# Altium PCB Drv870e_Dual_Motor_Drive_Board.PcbDoc
Units mil, origin at the board's own origin, x right, y up, seen from the top; angles counter-clockwise.
Board outline 2615 x 1130 mil, 2 copper layers (Top Layer, Bottom Layer); 44 components, 38 nets, 213 pads, 38 vias.
Unrouted connection lines stored in the file: 45.
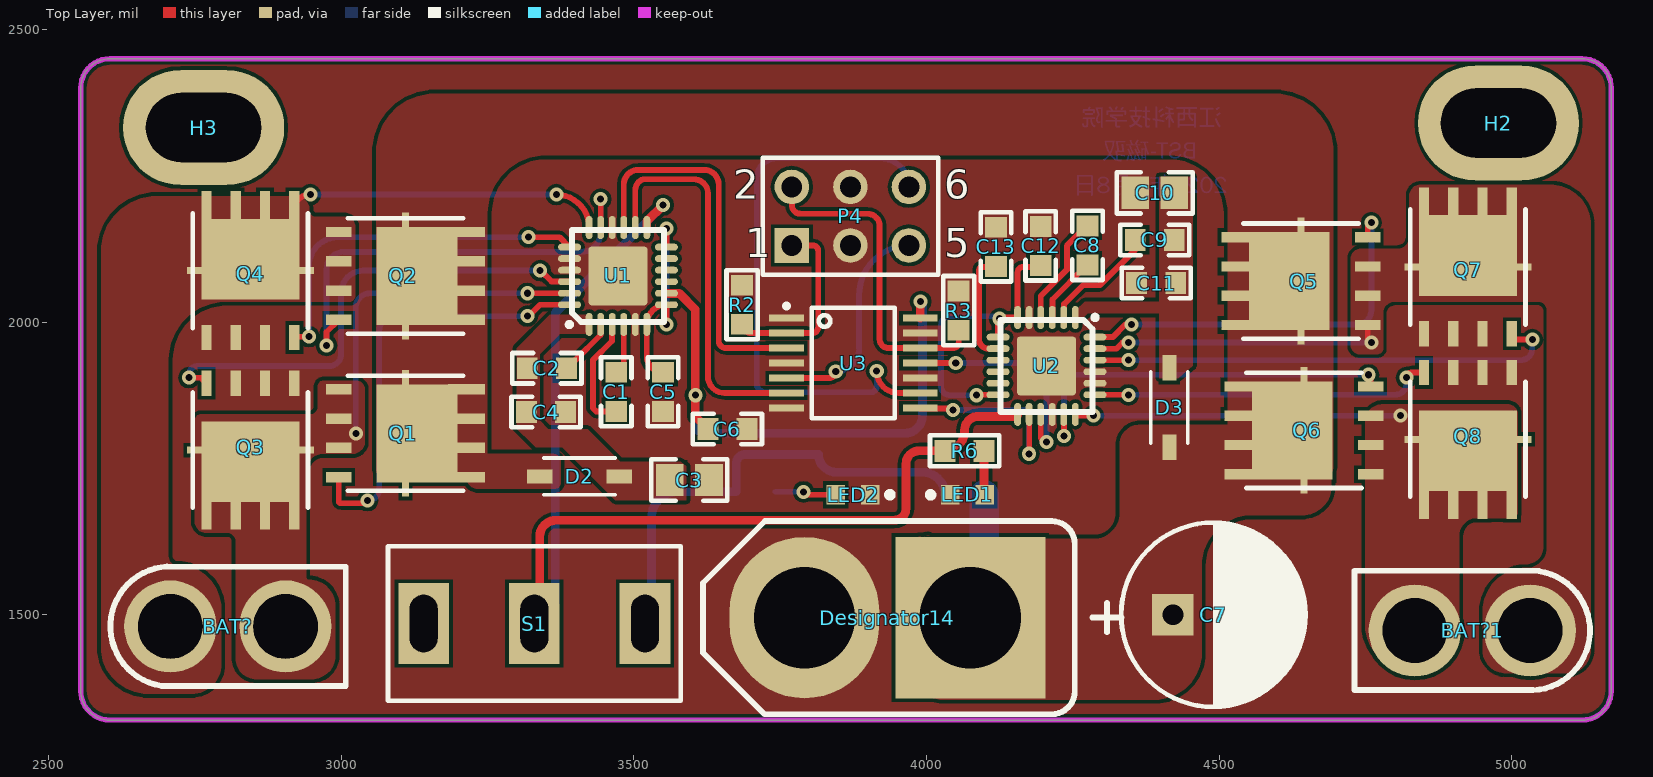
[diagram p0: Top Layer view]
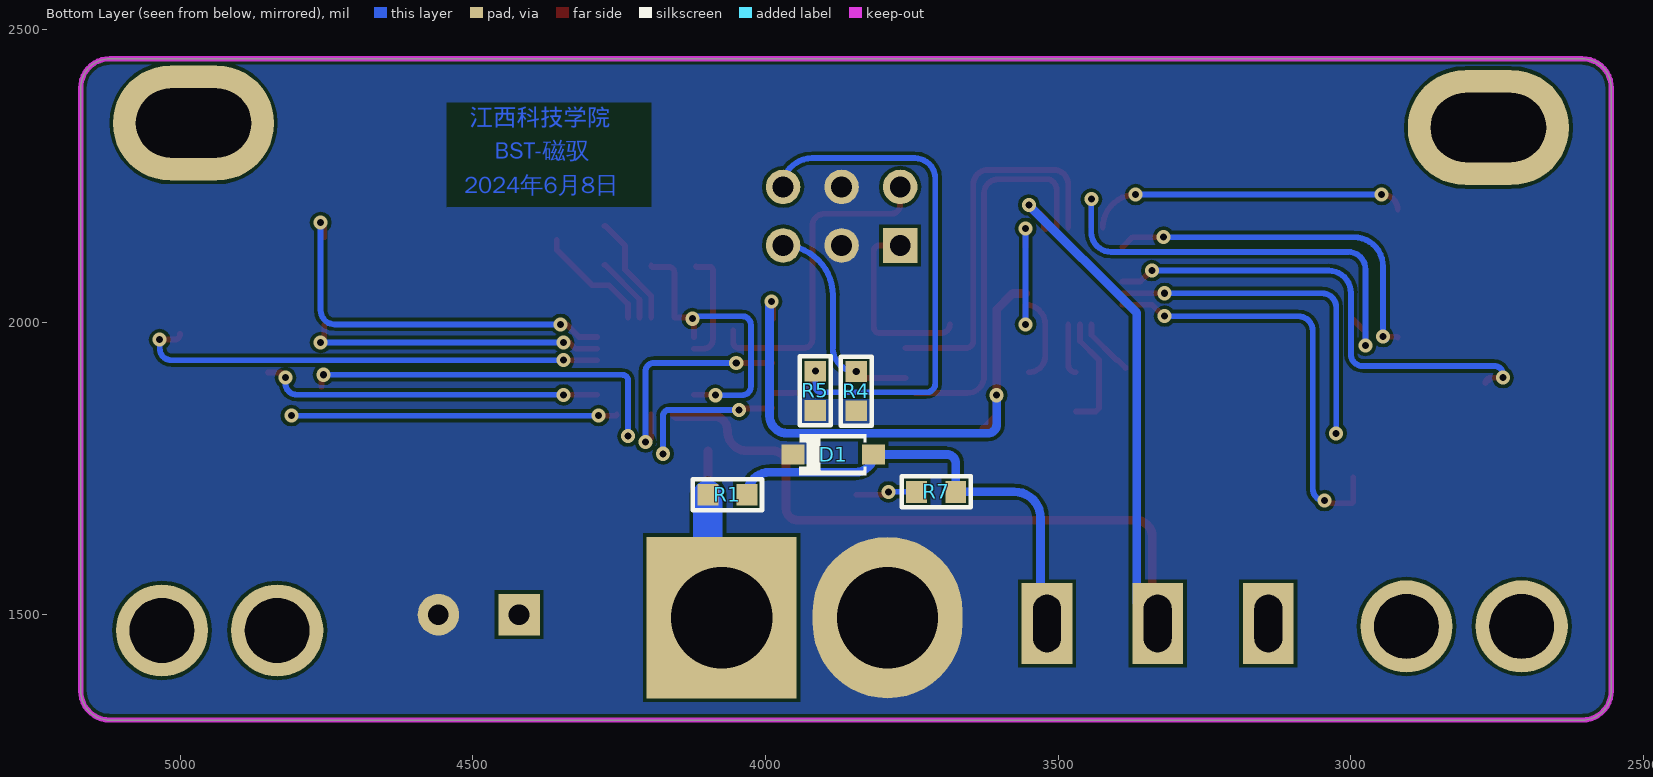
[diagram p1: Bottom Layer view, seen from below]
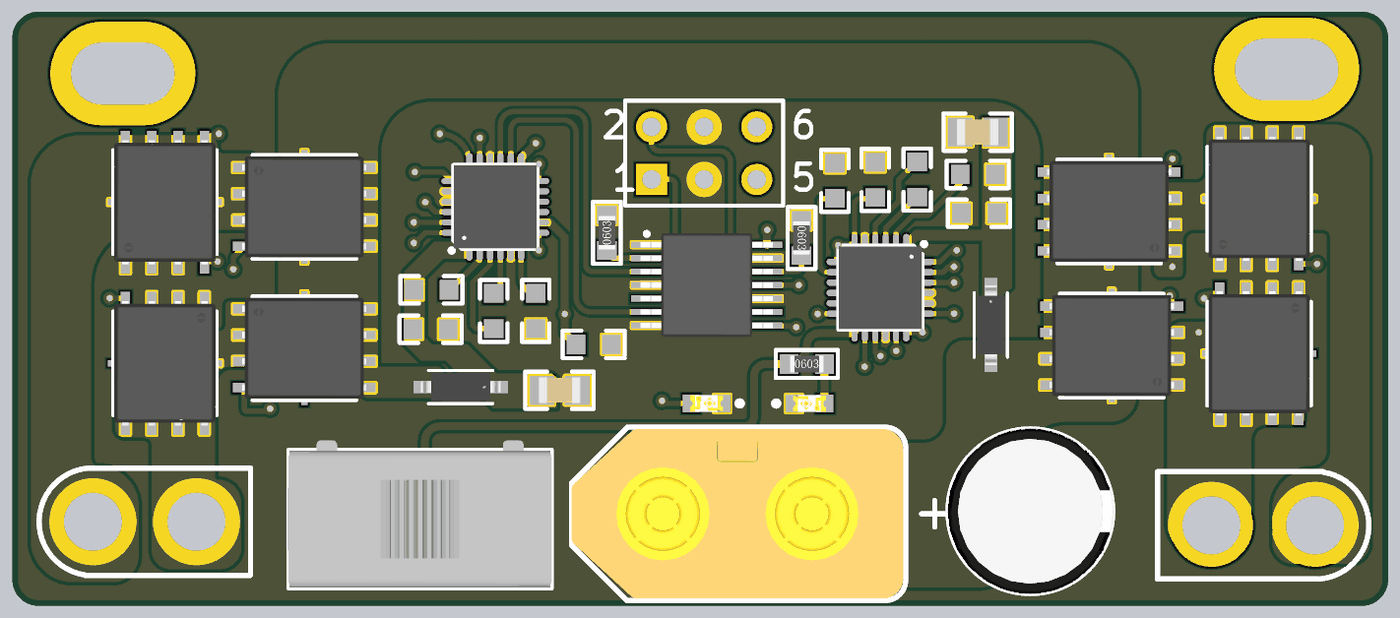
[diagram p2: 3D render of the assembled board from above, using the file's embedded part models]
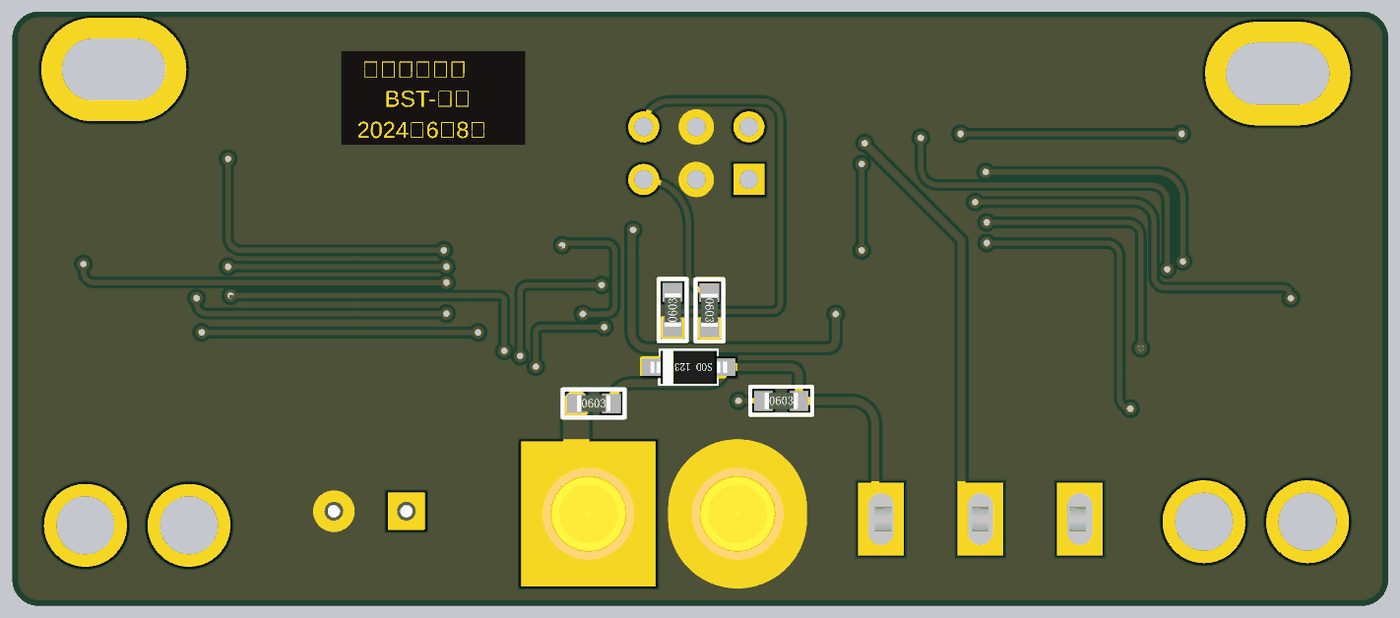
[diagram p3: 3D render of the assembled board from below, using the file's embedded part models]

## Layer stack, top to bottom
Top Solder: solder mask 0.4, Solder Resist, Dk 3.5
Top Layer: signal copper 1.4
Dielectric 1: dielectric 12.6, FR-4, Dk 4.8
Bottom Layer: signal copper 1.4
Bottom Solder: solder mask 0.4, Solder Resist, Dk 3.5

## Board outline
2555,1370 ccw(c2605,1370) 2605,1320 5120,1320 ccw(c5120,1370) 5170,1370 5170,2400 ccw(c5120,2400) 5120,2450 2605,2450 ccw(c2605,2400) 2555,2400

## Design rules (kind name [scope] priority, off if disabled: settings)
Clearance [All] p1: gap=6 ignorepadtopadclearanceinfootprint=FALSE
DiffPairsRouting [All] p1: maxlimit=10 minlimit=10 mostfreqgap=10 toplayer_minwidth=15 toplayer_maxwidth=15 toplayer_prefwidth=15 bottomlayer_minwidth=15 bottomlayer_maxwidth=15 bottomlayer_prefwidth=15 substack1={0DC552CE-7F27-4ACE-919D-D27756115782} toplayer_{0dc552ce-7f27-4ace-919d-d27756115782}_minwidth=15 toplayer_{0dc552ce-7f27-4ace-919d-d27756115782}_maxwidth=15 toplayer_{0dc552ce-7f27-4ace-919d-d27756115782}_prefwidth=15 bottomlayer_{0dc552ce-7f27-4ace-919d-d27756115782}_minwidth=15 bottomlayer_{0dc552ce-7f27-4ace-919d-d27756115782}_maxwidth=15 bottomlayer_{0dc552ce-7f27-4ace-919d-d27756115782}_prefwidth=15 maxuncoupledlength=500
PlaneConnect [All] p1: planeconnectstyle=Direct reliefexpansion=20 reliefentries=4 reliefconductorwidth=10 reliefairgap=10
PolygonConnect [All] p1: connectstyle=Direct reliefconductorwidth=10 reliefentries=4 polygonreliefangle="90 Angle" airgapwidth=10
RoutingVias [All] p1: holewidth=28 width=50 viastyle="Through Hole" minholewidth=28 minwidth=50 maxholewidth=28 maxwidth=50
SolderMaskExpansion [All] p1: expansion=4 istentingtop=FALSE
Width [All] p1: maxlimit=50 minlimit=10 preferedwidth=10 substack1={0DC552CE-7F27-4ACE-919D-D27756115782}
28 further rules are at their usual default settings.

## Classes and differential pairs
net class GND: GND
component class "Copy of Sheet2": C1 C2 C3 C4 C5 C6 C7 C8 C9 C10 C11 C12 C13 D1 D2 D3 H2 H3 LED1 LED2 P4 Q1 Q2 Q3 Q4 Q5 Q6 Q7 Q8 R1 R2 R3 R4 R5 R6 R7 S1 U1 U2 U3

## Components (designator, comment, footprint, x,y, rotation, side; value= is the part's Value field where it differs from the comment)
BAT? "LQ_XT30UPB-F" LQ_XT30UPB-F 2809.27,1480 r0 top
BAT?1 "LQ_XT30UPB-F" LQ_XT30UPB-F 4930,1473.11 r180 top (schematic designator BAT?)
C1 "100nF" CAPC1608[0603]S-N 3470,1880.76 r270 top
C2 "1uF" CAPC1608[0603]S-N 3351.54,1921.11 r0 top
C3 "10uF" CAPC2012[0805]S-N 3595,1730 r180 top
C4 "100nF" CAPC1608[0603]S-N 3350,1846.11 r180 top
C5 "1uF" CAPC1608[0603]S-N 3550,1880.76 r270 top
C6 "1uF" CAPC1608[0603]S-N 3660,1817.19 r180 top
C7 "220u/25V" CAPPR3.5-8X11.5 4490,1500 r0 top
C8 "100nF" CAPC1608[0603]S-N 4275,2130.86 r270 top
C9 "1uF" CAPC1608[0603]S-N 4390,2140.47 r180 top
C10 "10uF" CAPC2012[0805]S-N 4390,2220.83 r0 top
C11 "100nF" CAPC1608[0603]S-N 4392.37,2066.62 r0 top
C12 "1uF" CAPC1608[0603]S-N 4195.16,2130 r90 top
C13 "1uF" CAPC1608[0603]S-N 4118.49,2128.37 r270 top
D1 "Comment" SOD-123-L 3884.53,1773.71 r0 bottom
D1 "BZT52C3V3" SOD-123 3710,1587.8 r180 top
D2 "1N5819" 1N5819 3314.09,1762.7 r180 top
D3 "1N5819" 1N5819 4388.5,1761.13 r270 top
Designator14 "Comment" TX60-LI-S 3933.27,1495 r180 top
H2 "Holes" M3-MountSlot 4994.36,2362.8 r180 top
H3 "Holes" M3-MountSlot 2782.17,2355.16 r180 top
LED1 "LED" LEDC1608(0603) 4070,1704.86 r0 top
LED2 "LED" LEDC1608(0603) 3874.53,1705 r180 top
P4 "双排针2X3P 2.54MM直插" HDR2X3 3770,2130.86 r0 top
Q1 "TPH1R403NL_L" DFN5x6 3110,1810 r270 top
Q2 "TPH1R403NL_L" DFN5x6 3110,2078.78 r270 top
Q3 "TPH1R403NL_L" DFN5x6 2845,1781.3 r180 top
Q4 "TPH1R403NL_L" DFN5x6 2845,2087.81 r0 top
Q5 "TPH1R403NL_L" DFN5x6 4639.69,2070 r90 top
Q6 "TPH1R403NL_L" DFN5x6 4644.69,1815 r90 top
Q7 "TPH1R403NL_L" DFN5x6 4925,2094.17 r0 top
Q8 "TPH1R403NL_L" DFN5x6 4925,1799.69 r180 top
R1 "2.2K" RESC1608[0603]S-N 4065,1705 r180 bottom
R2 "10K" RESC1608[0603]S-N 3685,2029.56 r90 top
R3 "10K" RESC1608[0603]S-N 4055,2019.56 r270 top
R4 "10K" RESC1608[0603]S-N 3845,1882.02 r270 bottom
R5 "10K" RESC1608[0603]S-N 3915,1882.59 r90 bottom
R6 "330R" RESC1608[0603]S-N 4065,1780 r0 top
R7 "1K" RESC1608[0603]S-N 3708.46,1710 r180 bottom
S1 "SW1:T8013" SS12D10 3330,1485 r0 top
U1 "DRV8701E" QFN24-4x4 3472.97,2078.78 r90 top
U2 "DRV8701E" QFN24-4x4 4205,1925 r270 top
U3 "SN74HC125PWR" TSSOP-14 3875,1930 r0 top

## Footprints (in the part's own frame and the unit in brackets; to place one, negate y for a bottom-side part, rotate by r counter-clockwise, add the part's x,y. Pads: shape width x height; smd on the part's side, far side on the other; paste and mask are expansions set on the pad)
1N5819 [mil]
  rect 43.75x23.65 smd paste+0 mask+0: 1(-160.91,26.5) 2(-25.08,26.5)
  silkscreen extent -154,-5 -32,58, body extent -169,0 -17,53, height 32
CAPC1608[0603]S-N [mm]
  rect 0.9x0.95 smd: 1(-0.85,0) 2(0.85,0)
  silkscreen extent -1.5,-0.66 1.5,0.66, body extent -0.8,-0.41 0.8,0.41, height 0.79
CAPC2012[0805]S-N [mm]
  rect 1.2x1.4 smd: 1(-0.85,0) 2(0.85,0)
  silkscreen extent -1.65,-0.9 1.65,0.9, body extent -1,-0.63 1,0.62, height 1.25
CAPPR3.5-8X11.5 [mm]
  rect 1.8x1.8 hole 0.9: 1(-1.75,0)
  round 1.8 hole 0.9: 2(1.75,0)
  silkscreen extent -4,-4.01 4,4, body extent -4,-3.98 4,3.98, height 11.5
DFN5x6 [mm]
  rect 0.45x1.6 smd: 1(-1.905,2.65) 1(-0.635,2.65) 1(0.635,2.65) 1(1.905,2.65)
  rect 5.5x0.3 smd: 1(0,0)
  rect 4.25x3.5 smd: 1(0,0.5)
  rect 0.45x1.1 smd: 2(1.905,-2.9) 3(-1.905,-2.9) 3(-0.635,-2.9) 3(0.635,-2.9)
  silkscreen extent -2.5,-2.5 2.5,2.5, body extent -2.45,-3 2.45,3, height 1
HDR2X3 [mm] "Connector; Header; 3x2 Position"
  rect 1.5x1.5 hole 0.9: 1(0,0)
  round 1.5 hole 0.9: 2(0,2.54) 3(2.54,0) 4(2.54,2.54) 5(5.08,0) 6(5.08,2.54)
  silkscreen extent -1.27,-1.27 6.35,3.81
LEDC1608(0603) [mm]
  rect 0.8x0.85 smd: A(0.75,0) C(-0.75,0)
  silkscreen extent -1.72,-0.12 -1.48,0.12, body extent -0.8,-0.4 0.8,0.4, height 0.64
LQ_XT30UPB-F [mm]
  round 4 hole 2.8 slot 2.805 at 90 deg: 1(2.432,0) 2(-2.569,0)
  silkscreen extent -5.17,-2.59 5.04,2.6
M3-MountSlot [mm]
  oval 7x5 hole 3 slot 5 at 0 deg: 1(0.436,0.579)
QFN24-4x4 [mm]
  rrect10% 2.55x2.55 smd: 0(0,0)
  oval 1x0.3 smd: 1(-2.1,1.25) 2(-2.1,0.75) 3(-2.1,0.25) 4(-2.1,-0.25) 5(-2.1,-0.75) 6(-2.1,-1.25) 13(2.1,-1.25) 14(2.1,-0.75) 15(2.1,-0.25) 16(2.1,0.25) 17(2.1,0.75) 18(2.1,1.25)
  oval 0.3x1 smd: 7(-1.25,-2.1) 8(-0.75,-2.1) 9(-0.25,-2.1) 10(0.25,-2.1) 11(0.75,-2.1) 12(1.25,-2.1) 19(1.25,2.1) 20(0.75,2.1) 21(0.25,2.1) 22(-0.25,2.1) 23(-0.75,2.1) 24(-1.25,2.1)
  silkscreen extent -2.21,-2 2,2.21, body extent -2,-2 2,2, height 0.9
RESC1608[0603]S-N [mm]
  rect 0.9x0.95 smd: 1(-0.85,0) 2(0.85,0)
  silkscreen extent -1.5,-0.67 1.5,0.67, body extent -0.8,-0.4 0.8,0.4, height 0.45
SOD-123 [mm]
  rect 1.2x1.4 smd: 1(-840.775,188.833) 2(-837.375,188.833)
  silkscreen extent -840.58,187.83 -837.58,189.83
SOD-123-L [mm]
  rect 1x0.85 smd: A(-1.75,0) K(1.75,0)
  silkscreen extent -1.45,-0.9 1.48,0.9, body extent -1.85,-0.8 1.85,0.8, height 1.2
SS12D10 [mm]
  rect 2.2x3.5 hole 1.2 slot 2.5 at 90 deg mask+0.07: 1(-4.8,0) 2(0,0) 3(4.8,0)
  silkscreen extent -6.35,-3.35 6.35,3.35, body extent -6.4,-3.3 6.35,3.8, height 12.5
TSSOP-14 [mm]
  rect 1.5x0.3 smd mask+0.07: 1(-2.9,1.95) 2(-2.9,1.3) 3(-2.9,0.65) 4(-2.9,0) 5(-2.9,-0.65) 6(-2.9,-1.3) 7(-2.9,-1.95) 8(2.9,-1.95) 9(2.9,-1.3) 10(2.9,-0.65) 11(2.9,0) 12(2.9,0.65) 13(2.9,1.3) 14(2.9,1.95)
  silkscreen extent -2.99,-2.4 1.8,2.57, body extent -3.2,-2.5 3.2,2.5, height 1.13
TX60-LI-S [mm] "长：16mm，宽：8.2mm，高：16mm"
  rect 6.5x7 hole 4.4: 1(-3.6,0)
  oval 6.5x7 hole 4.4: 2(3.6,0)
  silkscreen extent -10.16,-4.19 8,4.19, body extent -8,-4.1 8,4.1, height 16.05

## Part data
C1 C2 C4 C5 C6 C8 C9 C11 C12 C13: library part 0603-C
C3 C10: library part 0805-C
H2 H3: library part 星月孔, "holes in the corner of the bord"
R1 R2 R3 R4 R5 R6 R7: library part 0603-R

## Via types
v1: diameter 24, hole 12, Top Layer to Bottom Layer, tented both sides, 38 vias

## Nets (pads, with @x,y where several pads share a name; then routed paths per layer and width w, separated by ;. In a path a pad name is that pad's centre, name@x,y a point inside that pad or via, vN(x,y) a via of type N, cw(c..) or ccw(c..) an arc to the next point about the centre after c; other vN are vias at no path point)
3V3: D1.2 D1.A R1.2 R7.2 S1.3 | length 810
  Bottom Layer w15: S1.3 ccw(c3518.98,1496.02) 3530,1496.02 3530,1665 cw(c3575,1665) 3575,1710 R7.2 3675,1758.71 cw(c3690,1758.71) 3690,1773.71 D1.A ccw(c3845.86,1773.71) 3845.86,1743.48 3993.06,1743.48 cw(c3993.06,1705) R1.2
DVDD: C6.2 U1.8 U3.14 | length 963.2
  Top Layer w15: U1.8 3555.93,2048.97 3577.47,2048.97 3605,2021.44 v1(3605,1875) 3605,1838.72 C6.2 ; U3.14 3989.17,2034.17 cw(c3990,2034.17) v1(3990,2035)
  Bottom Layer w15: v1(3605,1875) 3605,1825 ccw(c3620,1825) 3620,1810 3963.06,1810 ccw(c3963.06,1840) 3993.06,1840 3993.06,2031.94 ccw(c3990,2031.94) v1(3990,2035)
GND: C3.1 C4.1 C5.2 C6.1 C7.2 C10.1 C11.1 C12.2 C13.1 D1.1 D1.K Designator14.2 LED1.C LED2.C P4.3 P4.4 Q3.3 Q4.3 Q7.3 Q8.3 R2.2 R3.1 R4.2 R5.1 U1.0 U1.5 U1.16 U1.20 U1.21 U2.0 U2.5 U2.16 U2.20 U2.21 U3.1 U3.4 U3.7 U3.10 U3.13
L_A: BAT?.1 Q1.3 Q3.1 U1.23 | length 594.1
  Top Layer w10: v1(3318.07,2049.25) U1.23
  Bottom Layer w10: v1(3025,1810) 3025,2025 cw(c3049.25,2025) 3049.25,2049.25 v1(3318.07,2049.25)
L_B: BAT?.2 Q2.3 Q4.1 U1.18 | length 552.3
  Top Layer w10: Q4.1@2920,2192.15 cw(c2945.53,2192.15) v1@2945.53,2217.68 ; v1(3367.53,2217.68) cw(c3367.53,2161.45) U1.18
  Bottom Layer w10: v1@2945,2220 ccw(c2947.32,2220) v1(2947.32,2217.68) v1(3367.53,2217.68)
L_EN: U1.14 U3.6 | length 658.8
  Top Layer w10: U1.14 3502.5,2225.31 cw(c3522.19,2225.31) 3515.99,2244 3602.54,2244 cw(c3602.54,2220) 3626.54,2220 3626.54,1907.28 ccw(c3655,1907.28) 3655,1878.82 U3.6@3743.68,1878.82
L_EN_IN: P4.5 R4.1 U3.5 | length 377.2
  Top Layer w10: U3.5 3833.93,1904.41 ccw(c3833.93,1915.48) v1(3845,1915.48)
  Bottom Layer w10: v1(3845,1915.48) ccw(c3845,1955.48) 3885,1955.48 3885,2045.86 cw(c3970,2045.86) P4.5
L_PH: U1.15 U3.3 | length 654.3
  Top Layer w10: U1.15 3482.81,2235 cw(c3507.81,2235) 3507.81,2260 3620,2260 cw(c3620,2235) 3645,2235 3645,1967.78 ccw(c3657.19,1967.78) 3657.19,1955.59 U3.3
L_PH_IN: P4.1 R2.1 U3.2 | length 325.2
  Top Layer w10: R2.1 ccw(c3699.92,1996.1) 3699.92,1981.18 U3.2 3805,1981.18 ccw(c3805,1991.18) 3815,1991.18 3815,2122.34 ccw(c3806.48,2122.34) 3806.48,2130.86 P4.1
NetC1_1: C1.1 U1.4 | length 89.2
  Top Layer w10: C1.1 ccw(c3470,1927.03) 3482.81,1927.03 U1.4
NetC1_2: C1.2 U1.3 | length 199.1
  Top Layer w10: U1.3 3462.78,1995.75 3462.78,1967.78 3430,1935 3430,1853.15 3435.86,1847.29 C1.2
NetC2_1: C2.1 C3.2 C4.2 D2.1 U1.1
NetC2_2: C2.2 U1.2 | length 100.6
  Top Layer w10: C2.2 3385,1922.09 3397.72,1934.81 3400.16,1934.81 3443.1,1977.75 3443.1,1995.75 U1.2
NetC5_1: C5.1 U1.6 U1.7 U1.12 | length 379.7
  Top Layer w10: C5.1 cw(c3550,1942.03) 3522.19,1942.03 U1.6 cw(c3555.65,1996.1) U1.7 v1(3555.65,1996.1) ; U1.12 v1(3555.65,2160)
  Bottom Layer w10: v1(3555.65,1996.1) v1(3555.65,2160)
NetC8_1: C8.1 U2.4 | length 190.3
  Top Layer w10: U2.4 4195.16,2044.56 4239.86,2089.26 4239.86,2130.16 4274.02,2164.32 C8.1
NetC8_2: C8.2 U2.3 | length 115.2
  Top Layer w10: U2.3 4215.19,2008.02 4215.19,2038.57 4274.02,2097.39 C8.2
NetC9_1: C9.1 C10.2 C11.2 D3.1 U2.1
NetC9_2: C9.2 U2.2 | length 200.3
  Top Layer w10: U2.2 4234.87,2008.02 4234.87,2030.66 4267.24,2063.03 4296.18,2063.03 4356.54,2123.39 C9.2
NetC12_1: C12.1 U2.6 U2.7 U2.12 | length 510
  Top Layer w10: v1@4085,1875 cw(c4085.79,1875) 4085.79,1875.79 U2.12 ; U2.7 4122.32,2000 cw(c4130,2000) 4130,2007.68 U2.6 4155.79,2084.96 cw(c4165,2084.96) 4165,2094.17 4192.8,2094.17 ccw(c4192.8,2096.54) C12.1
  Bottom Layer w10: v1(4085.79,1875) 4040,1875 cw(c4040,1890) 4025,1890 4025,1995 cw(c4040,1995) 4040,2010 4120.71,2010 cw(c4120.71,2005.71) v1(4125,2005.71)
NetC13_2: C13.2 U2.8 | length 192.1
  Top Layer w10: C13.2 cw(c4117.76,2094.91) 4117.76,2094.17 4095,2094.17 ccw(c4095,2089.17) 4090,2089.17 4090,1970 ccw(c4105.47,1970) 4105.47,1954.53 U2.8
NetLED1_1: LED1.A R6.2 | length 75.7
  Top Layer w15: R6.2 4098.46,1705.92 ccw(c4099.53,1705.92) LED1.A
NetLED2_1: LED2.A R7.1 | length 105.9
  Top Layer w10: v1(3790,1710) ccw(c3795,1710) 3795,1705 LED2.A
  Bottom Layer w10: R7.1 v1(3790,1710)
NetQ1_2: Q1.2 U1.24 | length 743.5
  Top Layer w10: Q1.2 2995.83,1694.71 ccw(c3000,1694.71) 3000,1690.54 3040.54,1690.54 ccw(c3040.54,1695) v1(3045,1695) ; v1(3318.07,2010) 3320,2010 3339.56,2029.56 U1.24
  Bottom Layer w10: v1(3045,1695) ccw(c3045,1715) 3065,1715 3065,1985 cw(c3090,1985) 3090,2010 v1(3318.07,2010)
NetQ2_2: Q2.2 U1.17 | length 792.3
  Top Layer w10: v1(2975,1960) 2975,1982.95 2995,2002.95 cw(c2995.83,2002.95) Q2.2 ; U1.17 v1(3443.44,2210)
  Bottom Layer w10: v1(2975,1960) 2975,2090 cw(c3005,2090) 3005,2120 3410,2120 ccw(c3410,2153.44) 3443.44,2153.44 v1(3443.44,2210)
NetQ3_2: Q3.2 U1.22 | length 859.3
  Top Layer w10: v1(2740,1905) 2760.47,1905 cw(c2760.47,1895.47) Q3.2 ccw(c2764.17,1895.47) Q3.2@2764.17,1901.3 ; v1(3340,2087.84) 3341.06,2087.84 3359.62,2069.28 3389.95,2069.28 U1.22
  Bottom Layer w10: v1@2735,1905 v1(2740,1905) 2740,1910 cw(c2755,1910) 2755,1925 2980,1925 ccw(c2980,1945) 3000,1945 3000,2050 cw(c3037.84,2050) 3037.84,2087.84 v1(3340,2087.84)
NetQ4_2: Q4.2 U1.19 | length 641.6
  Top Layer w10: Q4.2 cw(c2921.36,1973.64) 2921.36,1975 v1(2945,1975) ; v1(3320,2145) 3373.28,2145 U1.19
  Bottom Layer w10: v1(3320,2145) 2995,2145 ccw(c2995,2095) 2945,2095 v1(2945,1975) ; v1(2945,1975) cw(c2940,1975) 2940,1970 v1(2945,1975)
NetQ5_2: Q5.2 U2.24 | length 673.5
  Top Layer w10: U2.24 4318.11,1974.21 4340,1996.1 v1(4350,1996.1) ; Q5.2 4753.86,2163.86 cw(c4760,2163.86) v1(4760,2170)
  Bottom Layer w10: v1(4350,1996.1) 4736.1,1996.1 ccw(c4736.1,2020) 4760,2020 v1(4760,2170)
NetQ6_2: Q6.2 U2.17 | length 680.9
  Top Layer w10: U2.17 4235,1841.85 v1(4235,1805) ; v1(4755,1910) cw(c4755,1906.14) 4758.86,1906.14 Q6.2
  Bottom Layer w10: v1(4235,1805) 4235,1899.06 4234.53,1899.53 cw(c4245,1899.53) 4245,1910 v1(4755,1910)
NetQ7_2: Q7.2 U2.22 | length 814.5
  Top Layer w10: U2.22 v1(4345,1934.84) ; Q7.2 ccw(c5010,1980) 5010,1970 v1(5035,1970)
  Bottom Layer w10: v1(4345,1934.84) 5014.84,1934.84 ccw(c5014.84,1955) 5035,1955 v1(5035,1970)
NetQ8_2: Q8.2 U2.19 | length 588.3
  Top Layer w10: U2.19 v1(4345,1875.79) ; v1(4820,1905) cw(c4828.86,1905) 4828.86,1913.86 Q8.2
  Bottom Layer w10: v1(4345,1875.79) 4800.79,1875.79 ccw(c4800.79,1895) 4820,1895 v1(4820,1905)
nSLEEP: R6.1 S1.2 U1.13 U2.13 | length 1978.8
  Top Layer w15: S1.2 ccw(c3330,1494.17) 3339.17,1494.17 3339.17,1633.33 cw(c3367.3,1633.33) 3367.3,1661.46 3945,1661.46 ccw(c3945,1681.46) 3965,1681.46 3965,1757.82 cw(c3987.18,1757.82) 3987.18,1780 R6.1 ccw(c4031.54,1813.46) 4065,1813.46 4065,1815 cw(c4088.75,1815) 4088.75,1838.75 4152.22,1838.75 ccw(c4152.22,1842.32) U2.13 ; U1.13 3522.19,2172.04 v1(3550,2199.86)
  Bottom Layer w15: S1.2 3365.81,1520.81 3365.81,2015.67 v1(3550,2199.86)
R_A: BAT?1.2 Q5.3 Q7.1 U2.23 | length 510.2
  Top Layer w10: U2.23 4324.53,1954.53 4335,1965 v1(4345,1965) ; Q5.3@4753.86,1995 4753.86,1971.14 ccw(c4760,1971.14) v1(4760,1965)
  Bottom Layer w10: v1(4345,1965) v1(4760,1965)
R_B: BAT?1.1 Q6.3 Q8.1 U2.18 | length 560
  Top Layer w10: U2.18 ccw(c4256.54,1842.32) 4256.54,1840 v1(4285,1840)
  Bottom Layer w10: v1(4285,1840) 4805,1840 cw(c4805,1835) v1@4810,1835
  other v1: 4810,1840
R_EN: U2.14 U3.8 | length 314.8
  Top Layer w10: U3.8 ccw(c3990.07,1853.23) 3990.07,1852.34 v1@4035,1852.34 ; v1(4175,1775) 4175.47,1775 U2.14
  Bottom Layer w10: v1(4045,1850) 4165,1850 cw(c4165,1840) 4175,1840 v1(4175,1775)
R_EN_IN: P4.6 R5.2 U3.9 | length 998.8
  Top Layer w10: v1(3915,1916.05) ccw(c3952.23,1916.05) 3952.23,1878.82 U3.9
  Bottom Layer w10: v1(3915,1916.05) 3915,1890 cw(c3905,1890) 3905,1880 3725,1880 cw(c3725,1895) 3710,1895 3710,2245 cw(c3745,2245) 3745,2280 3920.86,2280 cw(c3920.86,2230.86) P4.6
R_PH: U2.15 U3.11 | length 397.8
  Top Layer w10: U3.11 v1(4050,1930) ; U2.15 4195.16,1804.84 ccw(c4205,1804.84) v1(4205,1795)
  Bottom Layer w10: v1(4050,1930) 4191.05,1930 cw(c4191.05,1916.05) 4205,1916.05 v1(4205,1795)
R_PH_IN: P4.2 R3.2 U3.12 | length 565
  Top Layer w10: P4.2 3770,2200 ccw(c3785,2200) 3785,2185 3899.32,2185 cw(c3899.32,2164.32) 3920,2164.32 3920,1970.59 ccw(c3935,1970.59) 3935,1955.59 U3.12 4045.59,1955.59 ccw(c4045.59,1965) 4055,1965 R3.2
VM: C7.1 D2.2 D3.2 Designator14.1 Q1.1 Q2.1 Q5.1 Q6.1 R1.1 | length 219.7
  Bottom Layer w50: Designator14.1 4098.46,1518.46 R1.1
pads on no net: H2.1 H3.1 S1.1 U1.9 U1.10 U1.11 U2.9 U2.10 U2.11

## Polygon pours and split planes (outlines as drawn)
GND on Top Layer "GND" (solid, remove dead copper, pour order 70): 2365,2670 2365,830 cw(c2340,830) 2340,805 6205,805 ccw(c6205,850) 6250,850 6250,2550 ccw(c6195,2550) 6195,2605 2330,2605 ccw(c2330,2590) 2315,2590
NetC9_1 on Top Layer "GND" (solid, remove dead copper, pour order 68): 4254.21,2007.68 4254.21,2020 4255,2020 4270,2035 4405,2035 4405,2012.3 4402.3,2015 4275,2015 4275,2014.56 4256.54,1996.1 4255,1997.63 4255,2021.44
NetC9_1 on Top Layer "GND" (solid, remove dead copper, pour order 64): 4397.88,2248.44 4397.88,1904.41 4425.59,1904.41 4430,1904.41 4455,1925 4455,2248.44
NetC2_1 on Top Layer "GND" (solid, remove dead copper, pour order 62): 3293.31,1825 3332.1,1786.21 3377.5,1786.21 3468.35,1695.35 3590,1695.35 3590,1754.03 3580,1761.61 3577.58,1761.61 3476.89,1761.61 3421.32,1817.19 3353.84,1817.19 3339.17,1831.85 3339.17,1945 3374.17,1980 3422.86,1980 3425,1982.14 3425,2012.3 3356.38,2012.3 3299.67,1955.59 3299.67,1820
VM on Top Layer "GND" (solid, remove dead copper, pour order 56): 3225,1775 3361.61,1775 cw(c3361.61,1761.61) 3375,1761.61 3375,1725 cw(c3365,1725) 3365,1715 3234.33,1715 cw(c3234.33,1735) 3214.33,1735
VM on Top Layer "GND" (solid, remove dead copper, pour order 54): 3950,1630 4286.99,1630 ccw(c4286.99,1673.01) 4330,1673.01 4330,1790 cw(c4365,1790) 4365,1825 4656.59,1825 cw(c4656.59,1790) 4691.59,1790 4691.59,1719.22 cw(c4642.37,1719.22) 4642.37,1670 4555.87,1670 ccw(c4555.87,1584.13) 4470,1584.13 4470,1435 cw(c4390,1435) 4390,1355 4030.5,1355 cw(c4030.5,1430.5) 3955,1430.5 3955,1585 cw(c4005,1585) 4005,1635
VM on Top Layer "GND" (solid, remove dead copper, pour order 52): 3240,1730 ccw(c3240,1740) 3250,1740 3250,2185 cw(c3350,2185) 3350,2285 4415,2285 cw(c4415,2185) 4515,2185 4515,1770 ccw(c4560,1770) 4560,1725 4665,1725 ccw(c4665,1755) 4695,1755 4695,2290 ccw(c4595,2290) 4595,2390 3160,2390 ccw(c3160,2290) 3060,2290 3060,1750 ccw(c3080,1750) 3080,1730
L_B on Top Layer "GND" (solid, remove dead copper, pour order 50): 3005.43,2180 cw(c3005.43,2161.45) 3023.98,2161.45 3023.98,2043.98 cw(c3015,2043.98) 3015,2035 2805,2035 ccw(c2805,1935) 2705,1935 2705,1600 ccw(c2720,1600) 2720,1585 cw(c2720,1510) 2795,1510 2795,1414.79 cw(c2745.21,1414.79) 2745.21,1365 2670,1365 cw(c2670,1445) 2590,1445 2590,2120 cw(c2685,2120) 2685,2215 2922.68,2215 cw(c2922.68,2192.15) 2945.53,2192.15 ccw(c2957.68,2192.15) 2957.68,2180
L_A on Top Layer "GND" (solid, remove dead copper, pour order 48): 2970,1900 3025,1900 cw(c3025,1885) 3040,1885 3040,1795 cw(c3020,1795) 3020,1775 2970,1775 ccw(c2970,1745) 2940,1745 2940,1565.53 ccw(c2945.53,1565.53) 2945.53,1560 cw(c2945.53,1515.53) 2990,1515.53 2990,1430 cw(c2950,1430) 2950,1390 2855,1390 cw(c2855,1425) 2820,1425 2820,1625 ccw(c2805,1625) 2805,1640 2770,1640 cw(c2770,1660) 2750,1660 2750,1831.85 cw(c2760.47,1831.85) 2760.47,1842.32 2947.32,1842.32 ccw(c2947.32,1855) 2960,1855 2960,1890 cw(c2970,1890)
R_A on Top Layer "GND" (solid, remove dead copper, pour order 46): 4725,2107.5 4725,1960 ccw(c4740,1960) 4740,1945 4770.27,1945 ccw(c4770.27,1954.73) 4780,1954.73 4780,2015.42 cw(c4799.58,2015.42) 4799.58,2035 5045,2035 cw(c5045,2020) 5060,2020 5060,1615 cw(c5025,1615) 5025,1580 ccw(c5025,1505) 4950,1505 4950,1440 ccw(c4990,1440) 4990,1400 5095,1400 ccw(c5095,1440) 5135,1440 5135,2165 ccw(c5065,2165) 5065,2235 4845,2235 ccw(c4845,2215) 4825,2215 4825,2145 cw(c4805,2145) 4805,2125 4742.5,2125 ccw(c4742.5,2107.5)
R_B on Top Layer "GND" (solid, remove dead copper, pour order 44): 5005.05,1848.63 5000,1850 cw(c5000,1840) 5010,1840 5010,1675 cw(c5000,1675) 5000,1665 4940,1665 ccw(c4940,1635) 4910,1635 4910,1480 cw(c4840,1480) 4840,1410 4820,1410 cw(c4820,1480) 4750,1480 4750,1830 cw(c4780,1830) 4780,1860 4992.32,1860 cw(c4992.32,1842.32) 5010,1842.32
GND on Bottom Layer "GND" (solid, remove dead copper, pour order 74): 2360,2635 2360,1340 cw(c2300,1340) 2300,1280 4290,1280 cw(c4290,1180) 4390,1180 4390,945 ccw(c4490,945) 4490,845 5310,845 ccw(c5310,945) 5410,945 5410,2435 ccw(c5310,2435) 5310,2535 2225,2535 cw(c2225,2575) 2185,2575

## Keep-outs
Keep-Out Layer:
  the board outline again, w9

## Other copper
Bottom Layer:
  rectangle net GND: 4195,2196.63 4544.61,2197.02
  pour cut-out: 4195,2375 4545,2375 4545,2196.24 4544.22,2197.02 4195,2197.02
  text "江西科技学院" at 4505,2325 h50
  text "BST-磁驭" at 4462.54,2269.18 h50
  text "2024年6月8日" at 4515.03,2210.04 h50

## Silkscreen, mask and mechanical layers (free items; w line width, h text height)
Bottom Solder:
  rectangle: 4195,2197.02 4544.61,2375

## Text inside footprints (layer, text, board x,y; h text height)
P4: Top Overlay "6" at 4030,2210.86 h50; Top Overlay "5" at 4030,2110.86 h50; Top Overlay "2" at 3670,2210.86 h50; Top Overlay "1" at 3690,2110.86 h50